# Altium PCB opm.PcbDoc (part 3 of 6)
Units mil, origin at the board's own origin, x right, y up, seen from the top; angles counter-clockwise.
Board outline 4280 x 1445 mil, 4 copper layers (Signal Plane 1, Ground, Power, Signal Plane 2), stack 59.778 mil thick; 104 components, 61 nets, 369 pads, 159 vias.
Unrouted connection lines stored in the file: 4.
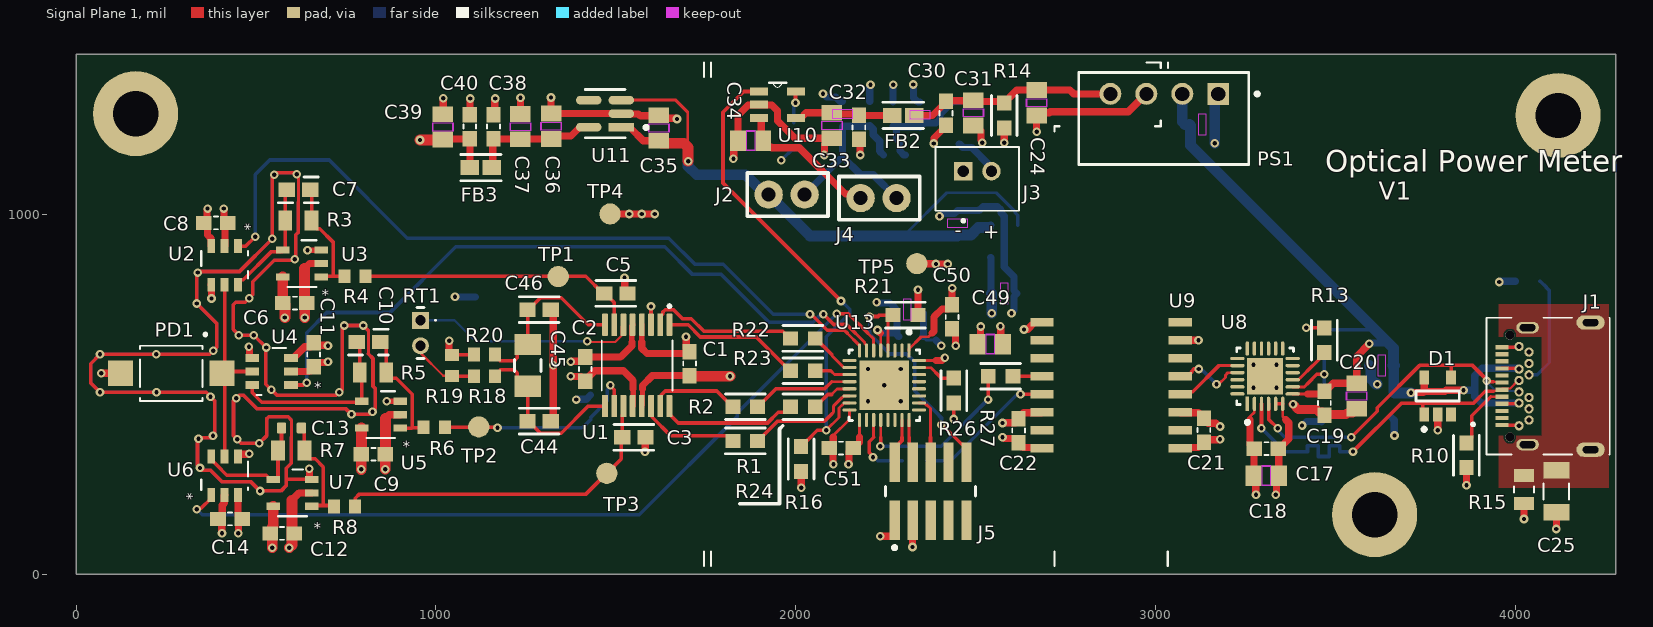
[diagram p0: Signal Plane 1 view]

## Part data (continued)
PS1: "DC/DC Converter ; 1W; Vin: 4.5-5.5V; Vout: 5V; Iout: 20mA; -40+85deg.C; THT; SIP4", Manufacturer="Recom Power", Max Operating Temperature=85°C, Max Output Power=1W, Max Output Voltage=5.25V, Max Supply Voltage=5.5V, Min Input Voltage=4.5V, Min Operating Temperature=-40°C, Min Output Voltage=4.75V, Nominal Output Voltage=5V, Nominal Supply Current=25mA, Output Current=200mA, Supplier Part Number=945-3159-ND, Switching Frequency=80kHz, Temperature Grade=Industrial, Category="Voltage Regulators - Switching", ComponentLink1Description=https://datasheet.octopart.com:443/RFM-0505S-Recom-Power-datasheet-133924900.pdf?src-supplier=Farnell, ComponentLink1URL=https://datasheet.octopart.com:443/RFM-0505S-Recom-Power-datasheet-133924900.pdf?src-supplier=Farnell, ComponentLink2Description=https://datasheet.octopart.com:443/RFM-0505S-Recom-Power-datasheet-104425650.pdf?src-supplier=element14+APAC, ComponentLink2URL=https://datasheet.octopart.com:443/RFM-0505S-Recom-Power-datasheet-104425650.pdf?src-supplier=element14+APAC, Height=10mm, Height - Seated (Max)=10.5mm, Length=11.5mm, Lifecycle Status=Production, Manufacturer Part Number=RFM-0505S, Max Power Dissipation=1W, Min Supply Voltage=4.5V, Nominal Supply Voltage=5V, Number of Circuits=1, Number of Outputs=1, Number of Terminals=4, Output Power=1W, Output Voltage=5V, Pricing="1=1.93, 5=1.854, 10=1.825, 25=1.7856, 50=1.7568, 100=1.7283, 250=1.69128, 500=1.66378 (USD)", REACH SVHC=Yes, RoHS=Compliant, Schedule B="8504409580, 8504409580|8504409580|8504409580|8504409580|8504409580", Stock=17910, Supplier=DigiKey, Supplier 1=DigiKey, Supplier Part Number 1=945-3159-ND, Terminal Pitch=2.54mm, Weight=1.4g, Width=6mm
R1 R2 R22 R23 R24 R25 R27: library part RC0603FR-0747RL, "100mW Thick Film Resistors 75V ±100ppm/℃ ±1% 47Ω 0603 Chip Resistor - Surface Mount ROHS", Case Code (Imperial)=0603, Case Code (Metric)=1608, Manufacturer="Yageo Group", Max Operating Temperature=155°C, Max Power Dissipation=100mW, Min Operating Temperature=-55°C, Supplier Part Number=311-47.0HRCT-ND, Temperature Coefficient=100ppm/°C, Tolerance=1%, Voltage Rating=50V, Working Voltage=75V, Case/Package=0603, Category="Chip SMD Resistors", China RoHS=Non-Compliant, ComponentLink1Description=https://datasheet.octopart.com:443/RC0603FR-0747RL-Yageo-datasheet-175887523.pdf?src-supplier=IHS, ComponentLink1URL=https://datasheet.octopart.com:443/RC0603FR-0747RL-Yageo-datasheet-175887523.pdf?src-supplier=IHS, ComponentLink2Description=https://datasheet.octopart.com:443/RC0603FR-0747RL-Yageo-datasheet-62067350.pdf?src-supplier=Newark, ComponentLink2URL=https://datasheet.octopart.com:443/RC0603FR-0747RL-Yageo-datasheet-62067350.pdf?src-supplier=Newark, ComponentLink3Description=https://datasheet.octopart.com:443/RC0603FR-0747RL-Yageo-datasheet-12596169.pdf?src-supplier=Newark, ComponentLink3URL=https://datasheet.octopart.com:443/RC0603FR-0747RL-Yageo-datasheet-12596169.pdf?src-supplier=Newark, ComponentLink4Description=https://datasheet.octopart.com:443/RC0603FR-0747RL-Yageo-datasheet-164759695.pdf?src-supplier=Upverter, ComponentLink4URL=https://datasheet.octopart.com:443/RC0603FR-0747RL-Yageo-datasheet-164759695.pdf?src-supplier=Upverter, ComponentLink5Description=https://datasheet.octopart.com:443/RC0603FR-0747RL-Yageo-datasheet-103092701.pdf?src-supplier=Upverter, ComponentLink5URL=https://datasheet.octopart.com:443/RC0603FR-0747RL-Yageo-datasheet-103092701.pdf?src-supplier=Upverter, ComponentLink6Description=https://datasheet.octopart.com:443/RC0603FR-0747RL-Yageo-datasheet-141435368.pdf?src-supplier=Upverter, ComponentLink6URL=https://datasheet.octopart.com:443/RC0603FR-0747RL-Yageo-datasheet-141435368.pdf?src-supplier=Upverter, ComponentLink7Description=https://datasheet.octopart.com:443/RC0603FR-0747RL-Yageo-Group-datasheet-190305687.pdf?src-supplier=Future+Electronics, ComponentLink7URL=https://datasheet.octopart.com:443/RC0603FR-0747RL-Yageo-Group-datasheet-190305687.pdf?src-supplier=Future+Electronics, ComponentLink8Description=https://datasheet.octopart.com:443/RC0603FR-0747RL-Yageo-datasheet-137700087.pdf?src-supplier=Future+Electronics, ComponentLink8URL=https://datasheet.octopart.com:443/RC0603FR-0747RL-Yageo-datasheet-137700087.pdf?src-supplier=Future+Electronics, ComponentLink9Description=https://datasheet.octopart.com:443/RC0603FR-0747RL-Yageo-datasheet-127823281.pdf?src-supplier=Future+Electronics, ComponentLink9URL=https://datasheet.octopart.com:443/RC0603FR-0747RL-Yageo-datasheet-127823281.pdf?src-supplier=Future+Electronics, ComponentLink10Description=https://datasheet.octopart.com:443/RC0603FR-0747RL-Yageo-datasheet-27584510.pdf?src-supplier=Future+Electronics, ComponentLink10URL=https://datasheet.octopart.com:443/RC0603FR-0747RL-Yageo-datasheet-27584510.pdf?src-supplier=Future+Electronics, ComponentLink11Description=https://datasheet.octopart.com:443/RC0603FR-0747RL-Yageo-datasheet-15599030.pdf?src-supplier=Future+Electronics, ComponentLink11URL=https://datasheet.octopart.com:443/RC0603FR-0747RL-Yageo-datasheet-15599030.pdf?src-supplier=Future+Electronics, ComponentLink12Description=https://datasheet.octopart.com:443/RC0603FR-0747RL-Yageo-datasheet-503470.pdf?src-supplier=Future+Electronics, ComponentLink12URL=https://datasheet.octopart.com:443/RC0603FR-0747RL-Yageo-datasheet-503470.pdf?src-supplier=Future+Electronics, ComponentLink13Description=https://datasheet.octopart.com:443/RC0603FR-0747RL-Yageo-datasheet-8328172.pdf?src-supplier=element14+APAC, ComponentLink13URL=https://datasheet.octopart.com:443/RC0603FR-0747RL-Yageo-datasheet-8328172.pdf?src-supplier=element14+APAC, ComponentLink14Description=https://datasheet.octopart.com:443/RC0603FR-0747RL-Yageo-datasheet-34211833.pdf?src-supplier=element14+APAC, ComponentLink14URL=https://datasheet.octopart.com:443/RC0603FR-0747RL-Yageo-datasheet-34211833.pdf?src-supplier=element14+APAC, ComponentLink15Description=https://datasheet.octopart.com:443/RC0603FR-0747RL-Yageo-datasheet-148775077.pdf?src-supplier=TME, ComponentLink15URL=https://datasheet.octopart.com:443/RC0603FR-0747RL-Yageo-datasheet-148775077.pdf?src-supplier=TME, ComponentLink16Description=https://datasheet.octopart.com/RC0603FR-0747RL-Yageo-datasheet-73766026.pdf, ComponentLink16URL=https://datasheet.octopart.com/RC0603FR-0747RL-Yageo-datasheet-73766026.pdf, ComponentLink17Description=https://datasheet.octopart.com:443/RC0603FR-0747RL-Yageo-datasheet-13691069.pdf?src-supplier=Farnell, ComponentLink17URL=https://datasheet.octopart.com:443/RC0603FR-0747RL-Yageo-datasheet-13691069.pdf?src-supplier=Farnell, ComponentLink18Description=https://datasheet.octopart.com:443/RC0603FR-0747RL-Yageo-datasheet-118562.pdf?src-supplier=DigiKey, ComponentLink18URL=https://datasheet.octopart.com:443/RC0603FR-0747RL-Yageo-datasheet-118562.pdf?src-supplier=DigiKey, ComponentLink19Description=http://sigma.octopart.com:80/conflict_mineral_statement/Yageo-company-3.pdf?src-supplier=Compliance+Statements, ComponentLink19URL=http://sigma.octopart.com:80/conflict_mineral_statement/Yageo-company-3.pdf?src-supplier=Compliance+Statements, ComponentLink20Description=http://sigma.octopart.com:80/rohs_statement/Yageo-company-2.pdf?src-supplier=Compliance+Statements, ComponentLink20URL=http://sigma.octopart.com:80/rohs_statement/Yageo-company-2.pdf?src-supplier=Compliance+Statements, Composition="Thick Film", Depth=800µm, Features="Moisture Resistant", Height=450µm, Lead Free="Lead Free", Length=1.6mm, Lifecycle Status=Production, Manufacturer Part Number=RC0603FR-0747RL, Military Standard=Not, Mounting Technology="Surface Mount", Number of Terminals=2, Number of Terminations=2, Packaging="Tape and Reel", Pins=2, Power Dissipation=100mW, Power Rating=100mW, Pricing="1=0.1, 10=0.008, 25=0.0072, 50=0.0062, 100=0.0057 (USD)", REACH SVHC=Yes, RoHS=Compliant, Schedule B="8533210045, 8533210045|8533210045, 8533210045|8533210045|8533210045, 8533210045|8533210045|8533210045|8533210045", Stock=424421, Supplier=DigiKey, Supplier 1=DigiKey, Supplier Part Number 1=311-47.0HRCT-ND, Termination=SMD/SMT, Voltage Rating (AC)=50V, Voltage Rating (DC)=50V, Weight=2.012816mg, Width=800µm
R3: library part TNPW080510K0BXEN, "Fixed Resistor, Thin Film, 0.125W, 10000ohm, 150V, 0.1% +/-Tol, 15ppm/Cel, Surface Mount, 0805", Case Code (Imperial)=0805, Case Code (Metric)=2012, Manufacturer=Vishay, Max Operating Temperature=125°C, Max Power Dissipation=125mW, Min Operating Temperature=-55°C, Supplier Part Number=541-1731-1-ND, Temperature Coefficient=15ppm/°C, Tolerance=0.1%, Working Voltage=150V, Case/Package=0805, Category="Chip SMD Resistors", China RoHS=Compliant, ComponentLink1Description=https://datasheet.octopart.com:443/TNPW080510K0BXEN-Vishay-datasheet-170520403.pdf?src-supplier=IHS, ComponentLink1URL=https://datasheet.octopart.com:443/TNPW080510K0BXEN-Vishay-datasheet-170520403.pdf?src-supplier=IHS, ComponentLink2Description=https://datasheet.octopart.com:443/TNPW080510K0BXEN-Vishay-Dale-datasheet-182026744.pdf?src-supplier=IHS, ComponentLink2URL=https://datasheet.octopart.com:443/TNPW080510K0BXEN-Vishay-Dale-datasheet-182026744.pdf?src-supplier=IHS, ComponentLink3Description=https://datasheet.octopart.com/TNPW080510K0BXEN-Vishay-datasheet-13498837.pdf, ComponentLink3URL=https://datasheet.octopart.com/TNPW080510K0BXEN-Vishay-datasheet-13498837.pdf, ComponentLink4Description=https://datasheet.octopart.com/TNPW080510K0BXEN-Vishay-datasheet-13414878.pdf, ComponentLink4URL=https://datasheet.octopart.com/TNPW080510K0BXEN-Vishay-datasheet-13414878.pdf, ComponentLink5Description=https://datasheet.octopart.com/TNPW080510K0BXEN-Vishay-datasheet-13295955.pdf, ComponentLink5URL=https://datasheet.octopart.com/TNPW080510K0BXEN-Vishay-datasheet-13295955.pdf, ComponentLink6Description=https://datasheet.octopart.com/TNPW080510K0BXEN-Vishay-datasheet-13196373.pdf, ComponentLink6URL=https://datasheet.octopart.com/TNPW080510K0BXEN-Vishay-datasheet-13196373.pdf, ComponentLink7Description=https://datasheet.octopart.com/TNPW080510K0BXEN-Vishay-datasheet-13143890.pdf, ComponentLink7URL=https://datasheet.octopart.com/TNPW080510K0BXEN-Vishay-datasheet-13143890.pdf, ComponentLink8Description=https://datasheet.octopart.com/TNPW080510K0BXEN-Vishay-datasheet-13081780.pdf, ComponentLink8URL=https://datasheet.octopart.com/TNPW080510K0BXEN-Vishay-datasheet-13081780.pdf, ComponentLink9Description=https://datasheet.octopart.com/TNPW080510K0BXEN-Vishay-datasheet-13052401.pdf, ComponentLink9URL=https://datasheet.octopart.com/TNPW080510K0BXEN-Vishay-datasheet-13052401.pdf, ComponentLink10Description=https://datasheet.octopart.com/TNPW080510K0BXEN-Vishay-datasheet-13034137.pdf, ComponentLink10URL=https://datasheet.octopart.com/TNPW080510K0BXEN-Vishay-datasheet-13034137.pdf, ComponentLink11Description=https://datasheet.octopart.com/TNPW080510K0BXEN-Vishay-datasheet-12585086.pdf, ComponentLink11URL=https://datasheet.octopart.com/TNPW080510K0BXEN-Vishay-datasheet-12585086.pdf, ComponentLink12Description=https://datasheet.octopart.com/TNPW080510K0BXEN-Vishay-datasheet-12543131.pdf, ComponentLink12URL=https://datasheet.octopart.com/TNPW080510K0BXEN-Vishay-datasheet-12543131.pdf, ComponentLink13Description=https://datasheet.octopart.com/TNPW080510K0BXEN-Vishay-datasheet-12532511.pdf, ComponentLink13URL=https://datasheet.octopart.com/TNPW080510K0BXEN-Vishay-datasheet-12532511.pdf, ComponentLink14Description=https://datasheet.octopart.com/TNPW080510K0BXEN-Vishay-datasheet-12519971.pdf, ComponentLink14URL=https://datasheet.octopart.com/TNPW080510K0BXEN-Vishay-datasheet-12519971.pdf, ComponentLink15Description=https://datasheet.octopart.com/TNPW080510K0BXEN-Vishay-datasheet-12509767.pdf, ComponentLink15URL=https://datasheet.octopart.com/TNPW080510K0BXEN-Vishay-datasheet-12509767.pdf, ComponentLink16Description=https://datasheet.octopart.com/TNPW080510K0BXEN-Vishay-datasheet-12365287.pdf, ComponentLink16URL=https://datasheet.octopart.com/TNPW080510K0BXEN-Vishay-datasheet-12365287.pdf, ComponentLink17Description=https://datasheet.octopart.com/TNPW080510K0BXEN-Vishay-datasheet-10854096.pdf, ComponentLink17URL=https://datasheet.octopart.com/TNPW080510K0BXEN-Vishay-datasheet-10854096.pdf, ComponentLink18Description=https://datasheet.octopart.com/TNPW080510K0BXEN-Vishay-datasheet-10678752.pdf, ComponentLink18URL=https://datasheet.octopart.com/TNPW080510K0BXEN-Vishay-datasheet-10678752.pdf, ComponentLink19Description=https://datasheet.octopart.com/TNPW080510K0BXEN-Vishay-datasheet-10283461.pdf, ComponentLink19URL=https://datasheet.octopart.com/TNPW080510K0BXEN-Vishay-datasheet-10283461.pdf, ComponentLink20Description=https://datasheet.octopart.com/TNPW080510K0BXEN-Vishay-datasheet-10185418.pdf, ComponentLink20URL=https://datasheet.octopart.com/TNPW080510K0BXEN-Vishay-datasheet-10185418.pdf, ComponentLink21Description=https://datasheet.octopart.com/TNPW080510K0BXEN-Vishay-datasheet-10055244.pdf, ComponentLink21URL=https://datasheet.octopart.com/TNPW080510K0BXEN-Vishay-datasheet-10055244.pdf, ComponentLink22Description=http://sigma.octopart.com:80/rohs_statement/Vishay-company-15.pdf?src-supplier=Compliance+Statements, ComponentLink22URL=http://sigma.octopart.com:80/rohs_statement/Vishay-company-15.pdf?src-supplier=Compliance+Statements, Composition="Thin Film", Contact Plating=Tin, Country of Origin="Germany, Israel", Depth=1.25mm, Export Control Classification Number (ECCN) Code=EAR99, Features="Anti-Sulfur, Automotive AEC-Q200, Moisture Resistant", Harmonized Tariff Schedule (HTS) Code=8533.21.00.30, Height=450µm, Introduction Date=2006-07-20, Length=2.0066mm, Lifecycle Status=Production, Manufacturer Part Number=TNPW080510K0BXEN, Military Standard=Not, Mounting Technology="Surface Mount", Number of Terminals=2, Number of Terminations=2, Packaging=Digi-Reel®, Power Dissipation=125mW, Power Rating=125mW, Pricing="1=0.83, 10=0.622, 25=0.5304, 50=0.5056 (USD)", Radiation Hardening=No, REACH SVHC=Yes, RoHS=Compliant, Schedule B="8533210045, 8533210045|8533210045|8533210045|8533210045|8533210045", Stock=2246, Supplier=DigiKey, Supplier 1=DigiKey, Supplier Part Number 1=541-1731-1-ND, Width=1.25mm
R4 R6 R8 R18 R20: library part TNPW06031K00BXEN, "Fixed Resistor, Thin Film, 0.1W, 1000ohm, 75V, 0.1% +/-Tol, 15ppm/Cel, Surface Mount, 0603", Case Code (Imperial)=0603, Case Code (Metric)=1608, Manufacturer=Vishay, Max Operating Temperature=125°C, Max Power Dissipation=100mW, Min Operating Temperature=-55°C, Supplier Part Number=541-1724-1-ND, Temperature Coefficient=15ppm/°C, Tolerance=0.1%, Working Voltage=75V, Case/Package=0603, Category="Chip SMD Resistors", China RoHS=Compliant, ComponentLink1Description=https://datasheet.octopart.com:443/TNPW06031K00BXEN-Vishay-datasheet-170520403.pdf?src-supplier=IHS, ComponentLink1URL=https://datasheet.octopart.com:443/TNPW06031K00BXEN-Vishay-datasheet-170520403.pdf?src-supplier=IHS, ComponentLink2Description=https://datasheet.octopart.com:443/TNPW06031K00BXEN-Vishay-Dale-datasheet-182026744.pdf?src-supplier=IHS, ComponentLink2URL=https://datasheet.octopart.com:443/TNPW06031K00BXEN-Vishay-Dale-datasheet-182026744.pdf?src-supplier=IHS, ComponentLink3Description=https://datasheet.octopart.com:443/TNPW06031K00BXEN-Vishay-datasheet-79783896.pdf?src-supplier=Future+Electronics, ComponentLink3URL=https://datasheet.octopart.com:443/TNPW06031K00BXEN-Vishay-datasheet-79783896.pdf?src-supplier=Future+Electronics, ComponentLink4Description=https://datasheet.octopart.com/TNPW06031K00BXEN-Vishay-datasheet-13498837.pdf, ComponentLink4URL=https://datasheet.octopart.com/TNPW06031K00BXEN-Vishay-datasheet-13498837.pdf, ComponentLink5Description=https://datasheet.octopart.com/TNPW06031K00BXEN-Vishay-datasheet-13414878.pdf, ComponentLink5URL=https://datasheet.octopart.com/TNPW06031K00BXEN-Vishay-datasheet-13414878.pdf, ComponentLink6Description=https://datasheet.octopart.com/TNPW06031K00BXEN-Vishay-datasheet-13295955.pdf, ComponentLink6URL=https://datasheet.octopart.com/TNPW06031K00BXEN-Vishay-datasheet-13295955.pdf, ComponentLink7Description=https://datasheet.octopart.com/TNPW06031K00BXEN-Vishay-datasheet-13196373.pdf, ComponentLink7URL=https://datasheet.octopart.com/TNPW06031K00BXEN-Vishay-datasheet-13196373.pdf, ComponentLink8Description=https://datasheet.octopart.com/TNPW06031K00BXEN-Vishay-datasheet-13143890.pdf, ComponentLink8URL=https://datasheet.octopart.com/TNPW06031K00BXEN-Vishay-datasheet-13143890.pdf, ComponentLink9Description=https://datasheet.octopart.com/TNPW06031K00BXEN-Vishay-datasheet-13081780.pdf, ComponentLink9URL=https://datasheet.octopart.com/TNPW06031K00BXEN-Vishay-datasheet-13081780.pdf, ComponentLink10Description=https://datasheet.octopart.com/TNPW06031K00BXEN-Vishay-datasheet-13052401.pdf, ComponentLink10URL=https://datasheet.octopart.com/TNPW06031K00BXEN-Vishay-datasheet-13052401.pdf, ComponentLink11Description=https://datasheet.octopart.com/TNPW06031K00BXEN-Vishay-datasheet-13034137.pdf, ComponentLink11URL=https://datasheet.octopart.com/TNPW06031K00BXEN-Vishay-datasheet-13034137.pdf, ComponentLink12Description=https://datasheet.octopart.com/TNPW06031K00BXEN-Vishay-datasheet-12585086.pdf, ComponentLink12URL=https://datasheet.octopart.com/TNPW06031K00BXEN-Vishay-datasheet-12585086.pdf, ComponentLink13Description=https://datasheet.octopart.com/TNPW06031K00BXEN-Vishay-datasheet-12543131.pdf, ComponentLink13URL=https://datasheet.octopart.com/TNPW06031K00BXEN-Vishay-datasheet-12543131.pdf, ComponentLink14Description=https://datasheet.octopart.com/TNPW06031K00BXEN-Vishay-datasheet-12532511.pdf, ComponentLink14URL=https://datasheet.octopart.com/TNPW06031K00BXEN-Vishay-datasheet-12532511.pdf, ComponentLink15Description=https://datasheet.octopart.com/TNPW06031K00BXEN-Vishay-datasheet-12519971.pdf, ComponentLink15URL=https://datasheet.octopart.com/TNPW06031K00BXEN-Vishay-datasheet-12519971.pdf, ComponentLink16Description=https://datasheet.octopart.com/TNPW06031K00BXEN-Vishay-datasheet-12509767.pdf, ComponentLink16URL=https://datasheet.octopart.com/TNPW06031K00BXEN-Vishay-datasheet-12509767.pdf, ComponentLink17Description=https://datasheet.octopart.com/TNPW06031K00BXEN-Vishay-datasheet-12365287.pdf, ComponentLink17URL=https://datasheet.octopart.com/TNPW06031K00BXEN-Vishay-datasheet-12365287.pdf, ComponentLink18Description=https://datasheet.octopart.com/TNPW06031K00BXEN-Vishay-datasheet-10854096.pdf, ComponentLink18URL=https://datasheet.octopart.com/TNPW06031K00BXEN-Vishay-datasheet-10854096.pdf, ComponentLink19Description=https://datasheet.octopart.com/TNPW06031K00BXEN-Vishay-datasheet-10678752.pdf, ComponentLink19URL=https://datasheet.octopart.com/TNPW06031K00BXEN-Vishay-datasheet-10678752.pdf, ComponentLink20Description=https://datasheet.octopart.com/TNPW06031K00BXEN-Vishay-datasheet-10283461.pdf, ComponentLink20URL=https://datasheet.octopart.com/TNPW06031K00BXEN-Vishay-datasheet-10283461.pdf, ComponentLink21Description=https://datasheet.octopart.com/TNPW06031K00BXEN-Vishay-datasheet-10185418.pdf, ComponentLink21URL=https://datasheet.octopart.com/TNPW06031K00BXEN-Vishay-datasheet-10185418.pdf, ComponentLink22Description=https://datasheet.octopart.com/TNPW06031K00BXEN-Vishay-datasheet-10055244.pdf, ComponentLink22URL=https://datasheet.octopart.com/TNPW06031K00BXEN-Vishay-datasheet-10055244.pdf, ComponentLink23Description=http://sigma.octopart.com:80/rohs_statement/Vishay-company-15.pdf?src-supplier=Compliance+Statements, ComponentLink23URL=http://sigma.octopart.com:80/rohs_statement/Vishay-company-15.pdf?src-supplier=Compliance+Statements, Composition="Thin Film", Contact Plating=Tin, Country of Origin="Germany, Israel", Depth=850µm, Export Control Classification Number (ECCN) Code=EAR99, Features="Anti-Sulfur, Automotive AEC-Q200, Moisture Resistant", Harmonized Tariff Schedule (HTS) Code=8533.21.00.30, Height=450µm, Introduction Date=2008-07-30, Length=1.6002mm, Lifecycle Status=Production, Manufacturer Part Number=TNPW06031K00BXEN, Military Standard=Not, Mounting Technology="Surface Mount", Number of Terminals=2, Number of Terminations=2, Packaging=Digi-Reel®, Power Dissipation=100mW, Power Rating=100mW, Pricing="1=0.66, 10=0.548, 25=0.5076, 50=0.4798, 100=0.454, 250=0.42332, 500=0.40256 (USD)", Radiation Hardening=No, REACH SVHC=Yes, RoHS=Compliant, Schedule B="8533210045, 8533210045|8533210045|8533210045|8533210045|8533210045|8533210045|8533210045|8533210045|8533210045|8533210045|8533210045|8533210045|8533210045|8533210045|8533210045|8533210045|8533210045|8533210045|8533210045|8533210045|8533210045|8533210045|8533210045|85", Stock=1829, Supplier=DigiKey, Supplier 1=DigiKey, Supplier Part Number 1=541-1724-1-ND, Width=850µm
R5: library part TNPW0805100KBXEN, "Fixed Resistor, Thin Film, 0.125W, 100000ohm, 150V, 0.1% +/-Tol, 15ppm/Cel, Surface Mount, 0805", Case Code (Imperial)=0805, Case Code (Metric)=2012, Manufacturer=Vishay, Max Operating Temperature=125°C, Max Power Dissipation=125mW, Min Operating Temperature=-55°C, Supplier Part Number=541-1729-1-ND, Temperature Coefficient=15ppm/°C, Tolerance=0.1%, Working Voltage=150V, Case/Package=0805, Category="Chip SMD Resistors", China RoHS=Compliant, ComponentLink1Description=https://datasheet.octopart.com:443/TNPW0805100KBXEN-Vishay-datasheet-170520403.pdf?src-supplier=IHS, ComponentLink1URL=https://datasheet.octopart.com:443/TNPW0805100KBXEN-Vishay-datasheet-170520403.pdf?src-supplier=IHS, ComponentLink2Description=https://datasheet.octopart.com:443/TNPW0805100KBXEN-Vishay-Dale-datasheet-182026744.pdf?src-supplier=IHS, ComponentLink2URL=https://datasheet.octopart.com:443/TNPW0805100KBXEN-Vishay-Dale-datasheet-182026744.pdf?src-supplier=IHS, ComponentLink3Description=https://datasheet.octopart.com/TNPW0805100KBXEN-Vishay-datasheet-13498837.pdf, ComponentLink3URL=https://datasheet.octopart.com/TNPW0805100KBXEN-Vishay-datasheet-13498837.pdf, ComponentLink4Description=https://datasheet.octopart.com/TNPW0805100KBXEN-Vishay-datasheet-13414878.pdf, ComponentLink4URL=https://datasheet.octopart.com/TNPW0805100KBXEN-Vishay-datasheet-13414878.pdf, ComponentLink5Description=https://datasheet.octopart.com/TNPW0805100KBXEN-Vishay-datasheet-13295955.pdf, ComponentLink5URL=https://datasheet.octopart.com/TNPW0805100KBXEN-Vishay-datasheet-13295955.pdf, ComponentLink6Description=https://datasheet.octopart.com/TNPW0805100KBXEN-Vishay-datasheet-13196373.pdf, ComponentLink6URL=https://datasheet.octopart.com/TNPW0805100KBXEN-Vishay-datasheet-13196373.pdf, ComponentLink7Description=https://datasheet.octopart.com/TNPW0805100KBXEN-Vishay-datasheet-13143890.pdf, ComponentLink7URL=https://datasheet.octopart.com/TNPW0805100KBXEN-Vishay-datasheet-13143890.pdf, ComponentLink8Description=https://datasheet.octopart.com/TNPW0805100KBXEN-Vishay-datasheet-13081780.pdf, ComponentLink8URL=https://datasheet.octopart.com/TNPW0805100KBXEN-Vishay-datasheet-13081780.pdf, ComponentLink9Description=https://datasheet.octopart.com/TNPW0805100KBXEN-Vishay-datasheet-13052401.pdf, ComponentLink9URL=https://datasheet.octopart.com/TNPW0805100KBXEN-Vishay-datasheet-13052401.pdf, ComponentLink10Description=https://datasheet.octopart.com/TNPW0805100KBXEN-Vishay-datasheet-13034137.pdf, ComponentLink10URL=https://datasheet.octopart.com/TNPW0805100KBXEN-Vishay-datasheet-13034137.pdf, ComponentLink11Description=https://datasheet.octopart.com/TNPW0805100KBXEN-Vishay-datasheet-12585086.pdf, ComponentLink11URL=https://datasheet.octopart.com/TNPW0805100KBXEN-Vishay-datasheet-12585086.pdf, ComponentLink12Description=https://datasheet.octopart.com/TNPW0805100KBXEN-Vishay-datasheet-12543131.pdf, ComponentLink12URL=https://datasheet.octopart.com/TNPW0805100KBXEN-Vishay-datasheet-12543131.pdf, ComponentLink13Description=https://datasheet.octopart.com/TNPW0805100KBXEN-Vishay-datasheet-12532511.pdf, ComponentLink13URL=https://datasheet.octopart.com/TNPW0805100KBXEN-Vishay-datasheet-12532511.pdf, ComponentLink14Description=https://datasheet.octopart.com/TNPW0805100KBXEN-Vishay-datasheet-12519971.pdf, ComponentLink14URL=https://datasheet.octopart.com/TNPW0805100KBXEN-Vishay-datasheet-12519971.pdf, ComponentLink15Description=https://datasheet.octopart.com/TNPW0805100KBXEN-Vishay-datasheet-12509767.pdf, ComponentLink15URL=https://datasheet.octopart.com/TNPW0805100KBXEN-Vishay-datasheet-12509767.pdf, ComponentLink16Description=https://datasheet.octopart.com/TNPW0805100KBXEN-Vishay-datasheet-12365287.pdf, ComponentLink16URL=https://datasheet.octopart.com/TNPW0805100KBXEN-Vishay-datasheet-12365287.pdf, ComponentLink17Description=https://datasheet.octopart.com/TNPW0805100KBXEN-Vishay-datasheet-10854096.pdf, ComponentLink17URL=https://datasheet.octopart.com/TNPW0805100KBXEN-Vishay-datasheet-10854096.pdf, ComponentLink18Description=https://datasheet.octopart.com/TNPW0805100KBXEN-Vishay-datasheet-10678752.pdf, ComponentLink18URL=https://datasheet.octopart.com/TNPW0805100KBXEN-Vishay-datasheet-10678752.pdf, ComponentLink19Description=https://datasheet.octopart.com/TNPW0805100KBXEN-Vishay-datasheet-10283461.pdf, ComponentLink19URL=https://datasheet.octopart.com/TNPW0805100KBXEN-Vishay-datasheet-10283461.pdf, ComponentLink20Description=https://datasheet.octopart.com/TNPW0805100KBXEN-Vishay-datasheet-10185418.pdf, ComponentLink20URL=https://datasheet.octopart.com/TNPW0805100KBXEN-Vishay-datasheet-10185418.pdf, ComponentLink21Description=https://datasheet.octopart.com/TNPW0805100KBXEN-Vishay-datasheet-10055244.pdf, ComponentLink21URL=https://datasheet.octopart.com/TNPW0805100KBXEN-Vishay-datasheet-10055244.pdf, ComponentLink22Description=http://sigma.octopart.com:80/rohs_statement/Vishay-company-15.pdf?src-supplier=Compliance+Statements, ComponentLink22URL=http://sigma.octopart.com:80/rohs_statement/Vishay-company-15.pdf?src-supplier=Compliance+Statements, Composition="Thin Film", Contact Plating=Tin, Depth=1.25mm, Export Control Classification Number (ECCN) Code=EAR99, Features="Anti-Sulfur, Automotive AEC-Q200, Moisture Resistant", Harmonized Tariff Schedule (HTS) Code=8533.21.00.30, Height=450µm, Length=2.0066mm, Lifecycle Status=Production, Manufacturer Part Number=TNPW0805100KBXEN, Military Standard=Not, Mounting Technology="Surface Mount", Number of Terminals=2, Number of Terminations=2, Packaging=Digi-Reel®, Power Dissipation=125mW, Power Rating=125mW, Pricing="1=0.56, 10=0.462, 25=0.4284, 50=0.4048, 100=0.383, 250=0.35688, 500=0.33922 (USD)", Radiation Hardening=No, REACH SVHC=Yes, RoHS=Compliant, Schedule B="8533210045, 8533210045|8533210045|8533210045|8533210045|8533210045", Stock=958, Supplier=DigiKey, Supplier 1=DigiKey, Supplier Part Number 1=541-1729-1-ND, Width=1.25mm
R7: library part TNPW08051M00BYEN, "Res Thin Film 0805 1M Ohm 0.1% 1/8W ±10ppm/°C Molded SMD SMD Paper T/R", Case Code (Imperial)=0805, Case Code (Metric)=2012, Manufacturer=Vishay, Max Operating Temperature=125°C, Min Operating Temperature=-55°C, Power Dissipation=125mW, Supplier Part Number=541-TNPW08051M00BYENCT-ND, Temperature Coefficient=10ppm/°C, Tolerance=0.1%, Voltage Rating=150V, Case/Package=0805, Category="Chip SMD Resistors", China RoHS=Compliant, ComponentLink1Description=https://datasheet.octopart.com:443/TNPW08051M00BYEN-Vishay-datasheet-170520403.pdf?src-supplier=Farnell, ComponentLink1URL=https://datasheet.octopart.com:443/TNPW08051M00BYEN-Vishay-datasheet-170520403.pdf?src-supplier=Farnell, ComponentLink2Description=https://datasheet.octopart.com:443/TNPW08051M00BYEN-Vishay-Dale-datasheet-182026744.pdf?src-supplier=IHS, ComponentLink2URL=https://datasheet.octopart.com:443/TNPW08051M00BYEN-Vishay-Dale-datasheet-182026744.pdf?src-supplier=IHS, ComponentLink3Description=https://datasheet.octopart.com/TNPW-High-Stability-Thin-Film-Chip-Resistors-Vishay-datasheet-family-82.pdf, ComponentLink3URL=https://datasheet.octopart.com/TNPW-High-Stability-Thin-Film-Chip-Resistors-Vishay-datasheet-family-82.pdf, ComponentLink4Description=https://datasheet.octopart.com/TNPW08051M00BYEN-Vishay-datasheet-13498837.pdf, ComponentLink4URL=https://datasheet.octopart.com/TNPW08051M00BYEN-Vishay-datasheet-13498837.pdf, ComponentLink5Description=https://datasheet.octopart.com/TNPW08051M00BYEN-Vishay-datasheet-13414878.pdf, ComponentLink5URL=https://datasheet.octopart.com/TNPW08051M00BYEN-Vishay-datasheet-13414878.pdf, ComponentLink6Description=https://datasheet.octopart.com/TNPW08051M00BYEN-Vishay-datasheet-13295955.pdf, ComponentLink6URL=https://datasheet.octopart.com/TNPW08051M00BYEN-Vishay-datasheet-13295955.pdf, ComponentLink7Description=https://datasheet.octopart.com/TNPW08051M00BYEN-Vishay-datasheet-13196373.pdf, ComponentLink7URL=https://datasheet.octopart.com/TNPW08051M00BYEN-Vishay-datasheet-13196373.pdf, ComponentLink8Description=https://datasheet.octopart.com/TNPW08051M00BYEN-Vishay-datasheet-13143890.pdf, ComponentLink8URL=https://datasheet.octopart.com/TNPW08051M00BYEN-Vishay-datasheet-13143890.pdf, ComponentLink9Description=https://datasheet.octopart.com/TNPW08051M00BYEN-Vishay-datasheet-13081780.pdf, ComponentLink9URL=https://datasheet.octopart.com/TNPW08051M00BYEN-Vishay-datasheet-13081780.pdf, ComponentLink10Description=https://datasheet.octopart.com/TNPW08051M00BYEN-Vishay-datasheet-13052401.pdf, ComponentLink10URL=https://datasheet.octopart.com/TNPW08051M00BYEN-Vishay-datasheet-13052401.pdf, ComponentLink11Description=https://datasheet.octopart.com/TNPW08051M00BYEN-Vishay-datasheet-13034137.pdf, ComponentLink11URL=https://datasheet.octopart.com/TNPW08051M00BYEN-Vishay-datasheet-13034137.pdf, ComponentLink12Description=https://datasheet.octopart.com/TNPW08051M00BYEN-Vishay-datasheet-12585086.pdf, ComponentLink12URL=https://datasheet.octopart.com/TNPW08051M00BYEN-Vishay-datasheet-12585086.pdf, ComponentLink13Description=https://datasheet.octopart.com/TNPW08051M00BYEN-Vishay-datasheet-12543131.pdf, ComponentLink13URL=https://datasheet.octopart.com/TNPW08051M00BYEN-Vishay-datasheet-12543131.pdf, ComponentLink14Description=https://datasheet.octopart.com/TNPW08051M00BYEN-Vishay-datasheet-12532511.pdf, ComponentLink14URL=https://datasheet.octopart.com/TNPW08051M00BYEN-Vishay-datasheet-12532511.pdf, ComponentLink15Description=https://datasheet.octopart.com/TNPW08051M00BYEN-Vishay-datasheet-12519971.pdf, ComponentLink15URL=https://datasheet.octopart.com/TNPW08051M00BYEN-Vishay-datasheet-12519971.pdf, ComponentLink16Description=https://datasheet.octopart.com/TNPW08051M00BYEN-Vishay-datasheet-12509767.pdf, ComponentLink16URL=https://datasheet.octopart.com/TNPW08051M00BYEN-Vishay-datasheet-12509767.pdf, ComponentLink17Description=https://datasheet.octopart.com/TNPW08051M00BYEN-Vishay-datasheet-12365287.pdf, ComponentLink17URL=https://datasheet.octopart.com/TNPW08051M00BYEN-Vishay-datasheet-12365287.pdf, ComponentLink18Description=https://datasheet.octopart.com/TNPW08051M00BYEN-Vishay-datasheet-10854096.pdf, ComponentLink18URL=https://datasheet.octopart.com/TNPW08051M00BYEN-Vishay-datasheet-10854096.pdf, ComponentLink19Description=https://datasheet.octopart.com/TNPW08051M00BYEN-Vishay-datasheet-10678752.pdf, ComponentLink19URL=https://datasheet.octopart.com/TNPW08051M00BYEN-Vishay-datasheet-10678752.pdf, ComponentLink20Description=https://datasheet.octopart.com/TNPW08051M00BYEN-Vishay-datasheet-10283461.pdf, ComponentLink20URL=https://datasheet.octopart.com/TNPW08051M00BYEN-Vishay-datasheet-10283461.pdf, ComponentLink21Description=https://datasheet.octopart.com/TNPW08051M00BYEN-Vishay-datasheet-10185418.pdf, ComponentLink21URL=https://datasheet.octopart.com/TNPW08051M00BYEN-Vishay-datasheet-10185418.pdf, ComponentLink22Description=https://datasheet.octopart.com/TNPW08051M00BYEN-Vishay-datasheet-10055244.pdf, ComponentLink22URL=https://datasheet.octopart.com/TNPW08051M00BYEN-Vishay-datasheet-10055244.pdf, ComponentLink23Description=http://sigma.octopart.com:80/rohs_statement/Vishay-company-15.pdf?src-supplier=Compliance+Statements, ComponentLink23URL=http://sigma.octopart.com:80/rohs_statement/Vishay-company-15.pdf?src-supplier=Compliance+Statements, Composition="Thin Film", Contact Plating=Tin, Country of Origin="Germany, Israel", Export Control Classification Number (ECCN) Code=EAR99, Harmonized Tariff Schedule (HTS) Code=8533.21.00.30, Height=450µm, Introduction Date=2008-07-30, Lifecycle Status=Production, Manufacturer Part Number=TNPW08051M00BYEN, Mounting Technology="Surface Mount", Number of Terminals=2, Power Rating=125mW, Pricing="1=1.03, 10=0.856, 25=0.794, 50=0.751, 100=0.7113, 250=0.66416, 500=0.63254 (USD)", Radiation Hardening=No, REACH SVHC=Yes, RoHS=Compliant, Schedule B="8533210045, 8533210045|8533210045|8533210045|8533210045|8533210045", Stock=1733, Supplier=DigiKey, Supplier 1=DigiKey, Supplier Part Number 1=541-TNPW08051M00BYENCT-ND, Termination=SMD/SMT, Width=1.25mm, Working Voltage=150V
R9: library part RC0603FR-0722K1L, "Res General Purpose Thick Film 0603 22.1K Ohm 1% 1/10W ±100ppm/°C Molded SMD Paper T/R", Case Code (Imperial)=0603, Case Code (Metric)=1608, Manufacturer="Yageo Group", Max Operating Temperature=155°C, Min Operating Temperature=-55°C, Power Dissipation=100mW, Supplier Part Number=311-22.1KHRCT-ND, Temperature Coefficient=100ppm/°C, Tolerance=1%, Voltage Rating=75V, Voltage Rating (DC)=50V, Case/Package=0603, Category="Chip SMD Resistors", China RoHS=Non-Compliant, ComponentLink1Description=https://datasheet.octopart.com:443/RC0603FR-0722K1L-Yageo-datasheet-175887523.pdf?src-supplier=IHS, ComponentLink1URL=https://datasheet.octopart.com:443/RC0603FR-0722K1L-Yageo-datasheet-175887523.pdf?src-supplier=IHS, ComponentLink2Description=https://datasheet.octopart.com:443/RC0603FR-0722K1L-Yageo-datasheet-141265859.pdf?src-supplier=Upverter, ComponentLink2URL=https://datasheet.octopart.com:443/RC0603FR-0722K1L-Yageo-datasheet-141265859.pdf?src-supplier=Upverter, ComponentLink3Description=https://datasheet.octopart.com:443/RC0603FR-0722K1L-Yageo-datasheet-103092701.pdf?src-supplier=Upverter, ComponentLink3URL=https://datasheet.octopart.com:443/RC0603FR-0722K1L-Yageo-datasheet-103092701.pdf?src-supplier=Upverter, ComponentLink4Description=https://sigma.octopart.com:443/138820526/technical_drawing/Yageo-RC0603FR-0722K1L.pdf?src-supplier=Upverter, ComponentLink4URL=https://sigma.octopart.com:443/138820526/technical_drawing/Yageo-RC0603FR-0722K1L.pdf?src-supplier=Upverter, ComponentLink5Description=https://datasheet.octopart.com:443/RC0603FR-0722K1L-Yageo-Group-datasheet-190305687.pdf?src-supplier=Newark, ComponentLink5URL=https://datasheet.octopart.com:443/RC0603FR-0722K1L-Yageo-Group-datasheet-190305687.pdf?src-supplier=Newark, ComponentLink6Description=https://datasheet.octopart.com:443/RC0603FR-0722K1L-Yageo-datasheet-62067350.pdf?src-supplier=Newark, ComponentLink6URL=https://datasheet.octopart.com:443/RC0603FR-0722K1L-Yageo-datasheet-62067350.pdf?src-supplier=Newark, ComponentLink7Description=https://datasheet.octopart.com:443/RC0603FR-0722K1L-Yageo-datasheet-8328172.pdf?src-supplier=Future+Electronics, ComponentLink7URL=https://datasheet.octopart.com:443/RC0603FR-0722K1L-Yageo-datasheet-8328172.pdf?src-supplier=Future+Electronics, ComponentLink8Description=https://datasheet.octopart.com:443/RC0603FR-0722K1L-Yageo-Group-datasheet-176638170.pdf?src-supplier=Future+Electronics, ComponentLink8URL=https://datasheet.octopart.com:443/RC0603FR-0722K1L-Yageo-Group-datasheet-176638170.pdf?src-supplier=Future+Electronics, ComponentLink9Description=https://datasheet.octopart.com:443/RC0603FR-0722K1L-Yageo-datasheet-164759695.pdf?src-supplier=Future+Electronics, ComponentLink9URL=https://datasheet.octopart.com:443/RC0603FR-0722K1L-Yageo-datasheet-164759695.pdf?src-supplier=Future+Electronics, ComponentLink10Description=https://datasheet.octopart.com:443/RC0603FR-0722K1L-Yageo-datasheet-137700087.pdf?src-supplier=Future+Electronics, ComponentLink10URL=https://datasheet.octopart.com:443/RC0603FR-0722K1L-Yageo-datasheet-137700087.pdf?src-supplier=Future+Electronics, ComponentLink11Description=https://datasheet.octopart.com:443/RC0603FR-0722K1L-Yageo-datasheet-27584510.pdf?src-supplier=Future+Electronics, ComponentLink11URL=https://datasheet.octopart.com:443/RC0603FR-0722K1L-Yageo-datasheet-27584510.pdf?src-supplier=Future+Electronics, ComponentLink12Description=https://datasheet.octopart.com:443/RC0603FR-0722K1L-Yageo-datasheet-15599030.pdf?src-supplier=Future+Electronics, ComponentLink12URL=https://datasheet.octopart.com:443/RC0603FR-0722K1L-Yageo-datasheet-15599030.pdf?src-supplier=Future+Electronics, ComponentLink13Description=https://datasheet.octopart.com:443/RC0603FR-0722K1L-Yageo-datasheet-12596169.pdf?src-supplier=Future+Electronics, ComponentLink13URL=https://datasheet.octopart.com:443/RC0603FR-0722K1L-Yageo-datasheet-12596169.pdf?src-supplier=Future+Electronics, ComponentLink14Description=https://datasheet.octopart.com:443/RC0603FR-0722K1L-Yageo-datasheet-8324193.pdf?src-supplier=Future+Electronics, ComponentLink14URL=https://datasheet.octopart.com:443/RC0603FR-0722K1L-Yageo-datasheet-8324193.pdf?src-supplier=Future+Electronics, ComponentLink15Description=https://datasheet.octopart.com:443/RC0603FR-0722K1L-Yageo-datasheet-148775077.pdf?src-supplier=TME, ComponentLink15URL=https://datasheet.octopart.com:443/RC0603FR-0722K1L-Yageo-datasheet-148775077.pdf?src-supplier=TME, ComponentLink16Description=https://datasheet.octopart.com:443/RC0603FR-0722K1L-Yageo-datasheet-79472498.pdf?src-supplier=Megastar, ComponentLink16URL=https://datasheet.octopart.com:443/RC0603FR-0722K1L-Yageo-datasheet-79472498.pdf?src-supplier=Megastar, ComponentLink17Description=https://datasheet.octopart.com/RC0603FR-0722K1L-Yageo-datasheet-73766026.pdf, ComponentLink17URL=https://datasheet.octopart.com/RC0603FR-0722K1L-Yageo-datasheet-73766026.pdf, ComponentLink18Description=http://sigma.octopart.com:80/conflict_mineral_statement/Yageo-company-3.pdf?src-supplier=Compliance+Statements, ComponentLink18URL=http://sigma.octopart.com:80/conflict_mineral_statement/Yageo-company-3.pdf?src-supplier=Compliance+Statements, ComponentLink19Description=http://sigma.octopart.com:80/rohs_statement/Yageo-company-2.pdf?src-supplier=Compliance+Statements, ComponentLink19URL=http://sigma.octopart.com:80/rohs_statement/Yageo-company-2.pdf?src-supplier=Compliance+Statements, Composition="Thick Film", Country of Origin="Mainland China, Taiwan", Export Control Classification Number (ECCN) Code=EAR99, Harmonized Tariff Schedule (HTS) Code=8533.21.00.30, Height=450µm, Introduction Date=2004-09-22, Lead Free="Lead Free", Length=1.6mm, Lifecycle Status=Production, Manufacturer Part Number=RC0603FR-0722K1L, Mounting Technology="Surface Mount", Number of Terminals=2, Power Rating=100mW, Pricing="1=0.1, 10=0.006, 25=0.0056 (USD)", REACH SVHC=Yes, RoHS=Compliant, Schedule B="8533210045, 8533210045|8533210045, 8533210045|8533210045|8533210045, 8533210045|8533210045|8533210045|8533210045", Stock=528025, Supplier=DigiKey, Supplier 1=DigiKey, Supplier Part Number 1=311-22.1KHRCT-ND, Termination=SMD/SMT, Width=800µm, Working Voltage=75V
R10 R11 R17: library part RC0603FR-075K1L, "Res Thick Film 0603 5.1K Ohm 1% 0.1W(1/10W) ±100ppm/C Pad SMD T/R", Case Code (Imperial)=0603, Manufacturer="Yageo Group", Max Operating Temperature=155°C, Max Power Dissipation=100mW, Min Operating Temperature=-55°C, Supplier Part Number=311-5.10KHRCT-ND, Temperature Coefficient=100ppm/°C, Tolerance=1%, Voltage Rating=75V, Voltage Rating (DC)=50V, Case/Package=0603, Category="Chip SMD Resistors", China RoHS=Non-Compliant, ComponentLink1Description=https://datasheet.octopart.com:443/RC0603FR-075K1L-Yageo-datasheet-175887523.pdf?src-supplier=IHS, ComponentLink1URL=https://datasheet.octopart.com:443/RC0603FR-075K1L-Yageo-datasheet-175887523.pdf?src-supplier=IHS, ComponentLink2Description=https://datasheet.octopart.com:443/RC0603FR-075K1L-Yageo-datasheet-103092701.pdf?src-supplier=Upverter, ComponentLink2URL=https://datasheet.octopart.com:443/RC0603FR-075K1L-Yageo-datasheet-103092701.pdf?src-supplier=Upverter, ComponentLink3Description=https://datasheet.octopart.com:443/RC0603FR-075K1L-Yageo-Group-datasheet-190305687.pdf?src-supplier=Newark, ComponentLink3URL=https://datasheet.octopart.com:443/RC0603FR-075K1L-Yageo-Group-datasheet-190305687.pdf?src-supplier=Newark, ComponentLink4Description=https://datasheet.octopart.com:443/RC0603FR-075K1L-Yageo-datasheet-8328172.pdf?src-supplier=Farnell, ComponentLink4URL=https://datasheet.octopart.com:443/RC0603FR-075K1L-Yageo-datasheet-8328172.pdf?src-supplier=Farnell, ComponentLink5Description=https://datasheet.octopart.com:443/RC0603FR-075K1L-Yageo-datasheet-62067350.pdf?src-supplier=Farnell, ComponentLink5URL=https://datasheet.octopart.com:443/RC0603FR-075K1L-Yageo-datasheet-62067350.pdf?src-supplier=Farnell, ComponentLink6Description=https://datasheet.octopart.com:443/RC0603FR-075K1L-Yageo-datasheet-34211833.pdf?src-supplier=element14+APAC, ComponentLink6URL=https://datasheet.octopart.com:443/RC0603FR-075K1L-Yageo-datasheet-34211833.pdf?src-supplier=element14+APAC, ComponentLink7Description=https://datasheet.octopart.com:443/RC0603FR-075K1L-Yageo-Group-datasheet-176638170.pdf?src-supplier=Future+Electronics, ComponentLink7URL=https://datasheet.octopart.com:443/RC0603FR-075K1L-Yageo-Group-datasheet-176638170.pdf?src-supplier=Future+Electronics, ComponentLink8Description=https://datasheet.octopart.com:443/RC0603FR-075K1L-Yageo-datasheet-164759695.pdf?src-supplier=Future+Electronics, ComponentLink8URL=https://datasheet.octopart.com:443/RC0603FR-075K1L-Yageo-datasheet-164759695.pdf?src-supplier=Future+Electronics, ComponentLink9Description=https://datasheet.octopart.com:443/RC0603FR-075K1L-Yageo-datasheet-137700087.pdf?src-supplier=Future+Electronics, ComponentLink9URL=https://datasheet.octopart.com:443/RC0603FR-075K1L-Yageo-datasheet-137700087.pdf?src-supplier=Future+Electronics, ComponentLink10Description=https://datasheet.octopart.com:443/RC0603FR-075K1L-Yageo-datasheet-15599030.pdf?src-supplier=Future+Electronics, ComponentLink10URL=https://datasheet.octopart.com:443/RC0603FR-075K1L-Yageo-datasheet-15599030.pdf?src-supplier=Future+Electronics, ComponentLink11Description=https://datasheet.octopart.com:443/RC0603FR-075K1L-Yageo-datasheet-12596169.pdf?src-supplier=Future+Electronics, ComponentLink11URL=https://datasheet.octopart.com:443/RC0603FR-075K1L-Yageo-datasheet-12596169.pdf?src-supplier=Future+Electronics, ComponentLink12Description=https://datasheet.octopart.com:443/RC0603FR-075K1L-Yageo-datasheet-503470.pdf?src-supplier=Future+Electronics, ComponentLink12URL=https://datasheet.octopart.com:443/RC0603FR-075K1L-Yageo-datasheet-503470.pdf?src-supplier=Future+Electronics, ComponentLink13Description=https://datasheet.octopart.com:443/RC0603FR-075K1L-Yageo-datasheet-148775077.pdf?src-supplier=TME, ComponentLink13URL=https://datasheet.octopart.com:443/RC0603FR-075K1L-Yageo-datasheet-148775077.pdf?src-supplier=TME, ComponentLink14Description=https://datasheet.octopart.com:443/RC0603FR-075K1L-Yageo-datasheet-79472498.pdf?src-supplier=Megastar, ComponentLink14URL=https://datasheet.octopart.com:443/RC0603FR-075K1L-Yageo-datasheet-79472498.pdf?src-supplier=Megastar, ComponentLink15Description=https://datasheet.octopart.com/RC0603FR-075K1L-Yageo-datasheet-73766026.pdf, ComponentLink15URL=https://datasheet.octopart.com/RC0603FR-075K1L-Yageo-datasheet-73766026.pdf, ComponentLink16Description=https://datasheet.octopart.com:443/RC0603FR-075K1L-Yageo-datasheet-118562.pdf?src-supplier=DigiKey, ComponentLink16URL=https://datasheet.octopart.com:443/RC0603FR-075K1L-Yageo-datasheet-118562.pdf?src-supplier=DigiKey, ComponentLink17Description=http://sigma.octopart.com:80/conflict_mineral_statement/Yageo-company-3.pdf?src-supplier=Compliance+Statements, ComponentLink17URL=http://sigma.octopart.com:80/conflict_mineral_statement/Yageo-company-3.pdf?src-supplier=Compliance+Statements, ComponentLink18Description=http://sigma.octopart.com:80/rohs_statement/Yageo-company-2.pdf?src-supplier=Compliance+Statements, ComponentLink18URL=http://sigma.octopart.com:80/rohs_statement/Yageo-company-2.pdf?src-supplier=Compliance+Statements, Composition="Thick Film", Depth=800µm, Features="Moisture Resistant", Height=450µm, Lead Free="Lead Free", Lifecycle Status=Production, Manufacturer Part Number=RC0603FR-075K1L, Military Standard=Not, Mounting Technology="Surface Mount", Number of Terminals=2, Number of Terminations=2, Packaging="Tape & Reel", Pins=2, Power Dissipation=100mW, Power Rating=100mW, Pricing="1=0.1, 10=0.007, 25=0.0068, 50=0.0062, 100=0.0057 (USD)", REACH SVHC=Yes, RoHS=Compliant, Schedule B="8533210045, 8533210045|8533210045, 8533210045|8533210045|8533210045, 8533210045|8533210045|8533210045|8533210045", Stock=539386, Supplier=DigiKey, Supplier 1=DigiKey, Supplier Part Number 1=311-5.10KHRCT-ND, Termination=SMD/SMT, Width=800µm, Working Voltage=75V